# Altium PCB indicator.PcbDoc
Units mil, origin at the board's own origin, x right, y up, seen from the top; angles counter-clockwise.
Board outline 6000 x 4000 mil, 2 copper layers (Top Layer, Bottom Layer); 25 components, 42 nets, 102 pads, 0 vias.
Unrouted connection lines stored in the file: 45.
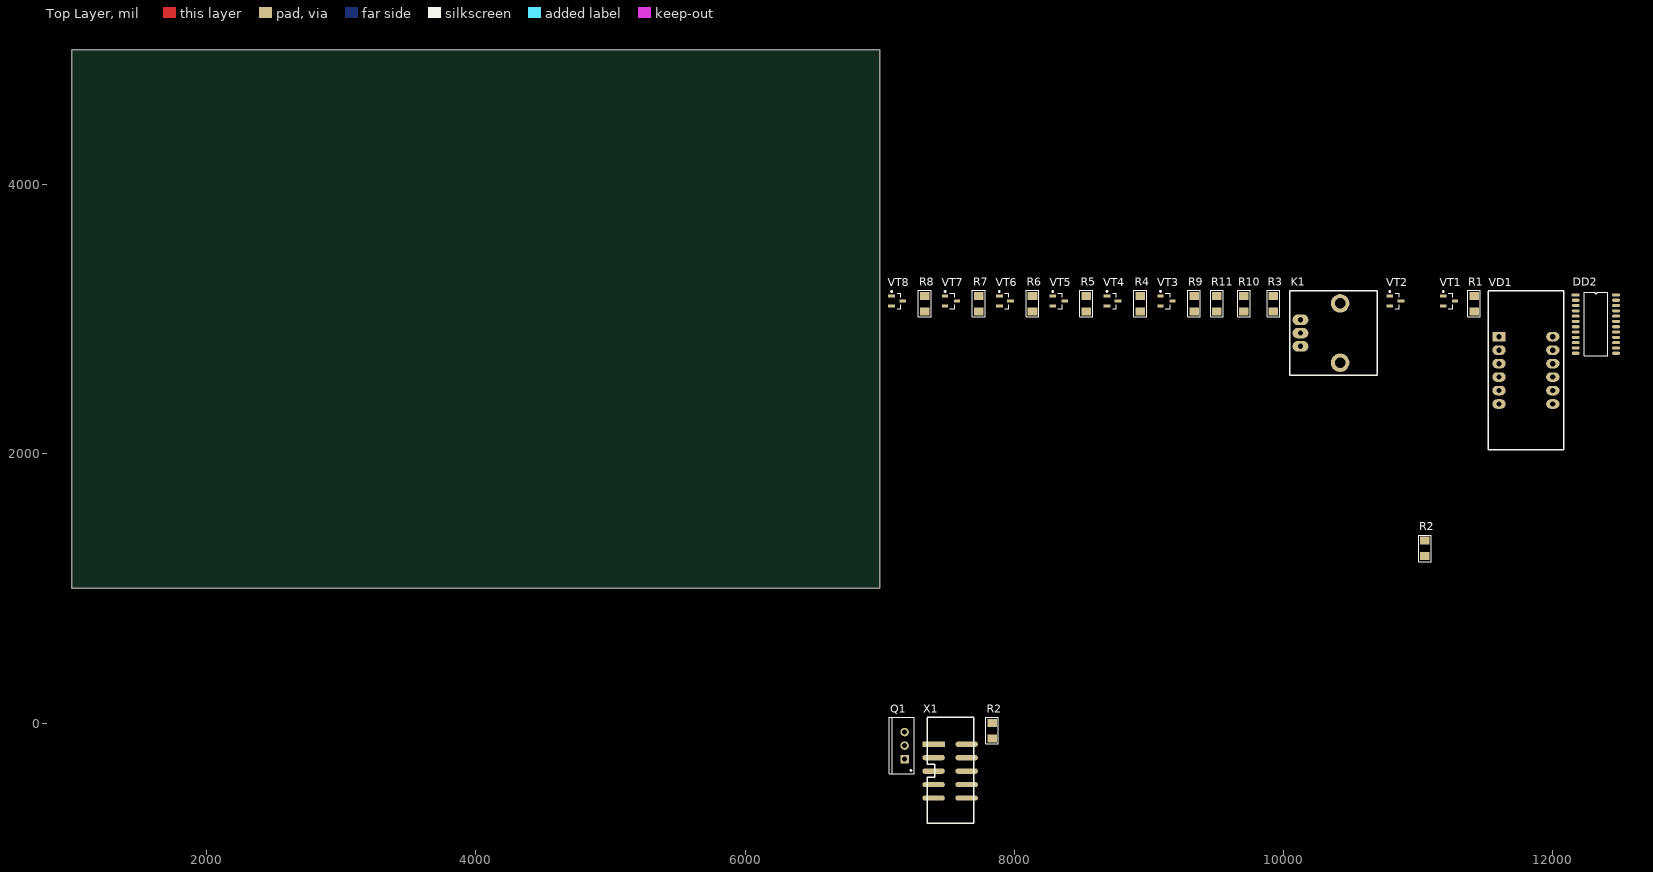
[diagram p0: Top Layer view]
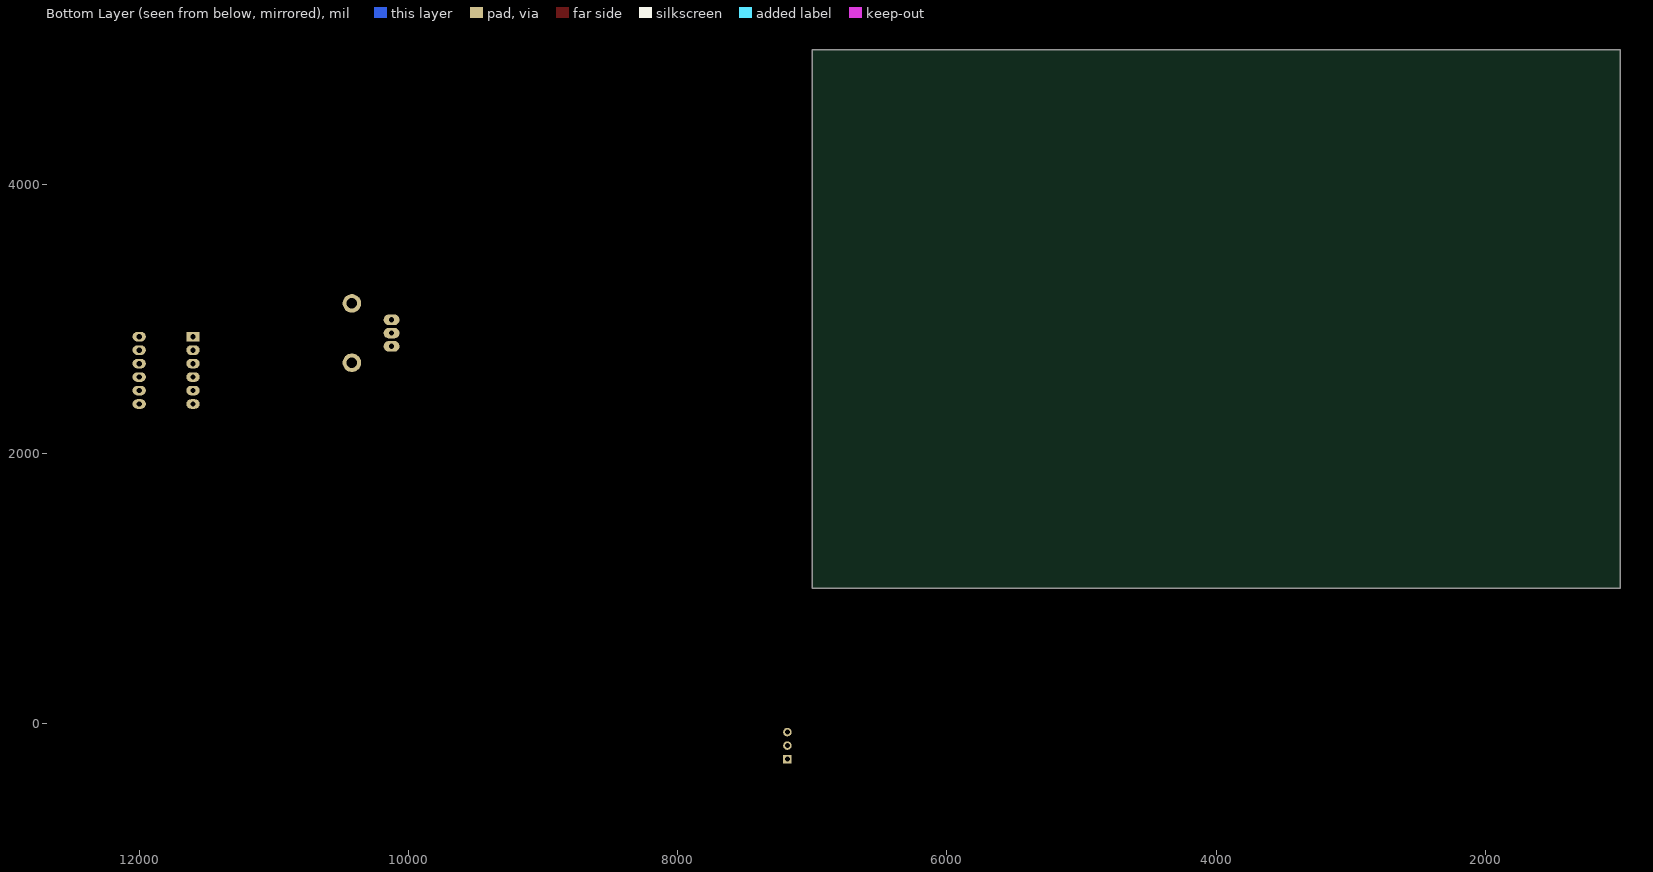
[diagram p1: Bottom Layer view, seen from below]

## Layer stack, top to bottom
Top Solder: solder mask 0.4, Solder Resist, Dk 3.5
Top Layer: signal copper 1.4
Dielectric 1: dielectric 12.6, FR-4, Dk 4.8
Bottom Layer: signal copper 1.4
Bottom Solder: solder mask 0.4, Solder Resist, Dk 3.5

## Board outline
1000,1000 7000,1000 7000,5000 1000,5000

## Design rules (kind name [scope] priority, off if disabled: settings)
Clearance [All] p1: gap=10
PolygonConnect [All] p1: connectstyle=Relief reliefconductorwidth=10 reliefentries=4 polygonreliefangle="90 Angle" airgapwidth=10
RoomDefinition indicator [InComponentClass('indicator')] p1: confinementstyle=ConfineIn formatcopy=TRUE lockcomponents=FALSE outline 7045,1650 12510,1650 12510,3325 7045,3325
RoomDefinition cpu [InComponentClass('cpu')] p2: confinementstyle=ConfineIn formatcopy=TRUE lockcomponents=FALSE outline 7060,-757.09 11125,-757.09 11125,1507.91 7060,1507.91
RoutingVias [All] p1: holewidth=28 width=50 viastyle="Through Hole" minholewidth=28 minwidth=50 maxholewidth=28 maxwidth=50
SolderMaskExpansion [All] p1: expansion=4
Width [All] p1: maxlimit=10 minlimit=10 preferedwidth=10
29 further rules are at their usual default settings.

## Classes and differential pairs
component class indicator: DD2 K1 R1 R2 R3 R4 R5 R6 R7 R8 R9 R10 R11 VD1 VT1 VT2 VT3 VT4 VT5 VT6 VT7 VT8
component class cpu: DA1 DD1 Q1 R2 X1

## Components (designator, comment, footprint, x,y, rotation, side; value= is the part's Value field where it differs from the comment)
DD2 "MBI5026CF" SOP24 12170,3180 r0 top
K1 "EC12" EC12E1220406 10125,2995 r0 top
Q1 "IRFZ46N" TO-220AB 7185,-167.09 r90 top
R1 "1K" R1206 11415,3115 r90 top
R2 "1K" R1206 7835,-57.09 r90 top
R2 "1K" R1206 11050,1297.91 r90 top
R3 "1K" R1206 9925,3115 r90 top
R4 "1K" R1206 8935,3115 r90 top
R5 "1K" R1206 8535,3115 r90 top
R6 "1K" R1206 8135,3115 r90 top
R7 "1K" R1206 7735,3115 r90 top
R8 "1K" R1206 7335,3115 r90 top
R9 "4.7K" R1206 9335,3115 r90 top
R10 "1K" R1206 9705,3115 r90 top
R11 "1K" R1206 9505,3115 r90 top
VD1 "3461BS" 3461bs 11600,2870 r0 top
VT1 "IRLML6302" SOT-23_N 11230,3135 r0 top
VT2 "BC847" SOT23_N 10830,3135 r0 top
VT3 "IRLML6302" SOT-23_N 9130,3135 r0 top
VT4 "BC847" SOT23_N 8730,3135 r0 top
VT5 "IRLML6302" SOT-23_N 8330,3135 r0 top
VT6 "BC847" SOT23_N 7930,3135 r0 top
VT7 "IRLML6302" SOT-23_N 7530,3135 r0 top
VT8 "BC847" SOT23_N 7130,3135 r0 top
X1 "BHS-10" BHS-10 7400,-157.09 r0 top

## Footprints (in the part's own frame and the unit in brackets; to place one, negate y for a bottom-side part, rotate by r counter-clockwise, add the part's x,y. Pads: shape width x height; smd on the part's side, far side on the other; paste and mask are expansions set on the pad)
3461bs [mm]
  rect 2.5x1.8 hole 1: 1(0,0)
  oval 2.5x1.8 hole 1: 2(0,-2.54) 3(0,-5.08) 4(0,-7.62) 5(0,-10.16) 6(0,-12.7) 7(10.16,-12.7) 8(10.16,-10.16) 9(10.16,-7.62) 10(10.16,-5.08) 11(10.16,-2.54) 12(10.16,0)
  silkscreen extent -2.05,-21.35 12.2,8.65, body extent -1.9,-21.45 12.1,8.55, height 7.2
BHS-10 [mm]
  rect 4.25x1 smd: 1(0,0)
  oval 4.25x1 smd: 2(6.25,0) 3(0,-2.54) 4(6.25,-2.54) 5(0,-5.08) 6(6.25,-5.08) 7(0,-7.62) 8(6.25,-7.62) 9(0,-10.16) 10(6.25,-10.16)
  silkscreen extent -1.2,-14.95 7.55,5.05, body extent -1.2,-14.95 7.55,5.05, height 8.6
EC12E1220406 [mm]
  oval 3x2 hole 1: 1(0,0) 2(0,-2.5) 3(0,-5)
  round 3.5 hole 2: 2(7.5,-8.1) 5(7.5,3.1)
  silkscreen extent -2,-10.5 14.5,5.5, body extent -0.15,-9.5 14.1,4.5, height 20.2
R1206 [mm]
  rect 1.5x1.8 smd: 1(-1.45,0) 2(1.45,0)
  silkscreen extent -2.5,-1.2 2.5,1.2, body extent -1.6,-0.85 1.6,0.85, height 0.6
SOP24 [mm]
  rect 1.5x0.6 smd: 1(0,0)
  oval 1.5x0.6 smd: 2(0,-1) 3(0,-2) 4(0,-3) 5(0,-4) 6(0,-5) 7(0,-6) 8(0,-7) 9(0,-8) 10(0,-9) 11(0,-10) 12(0,-11) 13(7.62,-11) 14(7.62,-10) 15(7.62,-9) 16(7.62,-8) 17(7.62,-7) 18(7.62,-6) 19(7.62,-5) 20(7.62,-4) 21(7.62,-3) 22(7.62,-2) 23(7.62,-1) 24(7.62,0)
  silkscreen extent 1.58,-11.5 6.04,0.5, body extent 0.75,-12 6.85,1, height 1.9
SOT23_N [mm] "SOT23, 3-Leads, Body 2.9x1.3mm, Pitch 0.95mm, Lead Span 2.3mm, IPC Medium Density"
  rect 1.3x0.6 smd: 1(-1.05,0.95) 2(-1.05,-0.95) 3(1.05,0)
  silkscreen extent -1.17,-1.5 0.7,1.92, body extent -0.7,-1.5 0.7,1.5, height 1.1
SOT-23_N [mm] "SOT23, 3-Leads, Body 2.9x1.3mm, Pitch 0.95mm, Lead Span 2.3mm, IPC Medium Density"
  rect 1.15x0.6 smd: 1(-1.125,0.95) 2(-1.125,-0.95) 3(1.125,0)
  silkscreen extent -1.25,-1.5 0.7,1.92, body extent -0.7,-1.5 0.7,1.5, height 1.11
TO-220AB [mm] "TO, Thru-Hole, Vertical, Heatsink Mounted; 3 In-Line Leads; Pitch 2.54 mm"
  rect 1.6x1.6 hole 1: 1(-2.54,0)
  round 1.6 hole 1: 2(0,0) 3(2.54,0)
  silkscreen extent -5.35,-1.85 5.35,2.85, body extent -5.4,-1.9 5.4,2.9, height 19.3

## Part data
K1: library part EC12E1220406
Q1 VT1 VT3 VT5 VT7: "HEXFET Power MOSFET"
R1 R2 R2 R3 R4 R5 R6 R7 R8 R9 R10 R11: library part Res
VT2 VT4 VT6 VT8: "NPN General-purpose Transistor"

## Nets (pads, with @x,y where several pads share a name; then routed paths per layer and width w, separated by ;. In a path a pad name is that pad's centre, name@x,y a point inside that pad or via, vN(x,y) a via of type N, cw(c..) or ccw(c..) an arc to the next point about the centre after c; other vN are vias at no path point)
5V: DD2.24 R10.1 R11.1
12V: R1.2 R3.2 R5.2 R7.2 VT1.2 VT3.2 VT5.2 VT7.2
/OE: 
A: DD2.5 VD1.11
A1: VD1.12 VT1.3
A2: VD1.9 VT3.3
A3: VD1.8 VT5.3
A4: VD1.6 VT7.3
B: DD2.6 VD1.7
C: DD2.7 VD1.4
D: DD2.8 VD1.2
E: DD2.9 VD1.1
ENC_A: K1.1 R11.2
ENC_B: K1.3 R10.2
F: DD2.10 VD1.10
G: DD2.11 VD1.5
GND: DD2.1 K1.2 R9.1 VT2.2 VT4.2 VT6.2 VT8.2 X1.2 X1.10
H: DD2.12 VD1.3
LE: DD2.4
MISO: X1.3
MOSI: X1.9
NetDD2_23: DD2.23 R9.2
NetR1_1: R1.1 VT1.1 VT2.3
NetR2_1: VT2.1
NetR3_1: R3.1 VT3.1 VT4.3
NetR4_1: R4.1 VT4.1
NetR5_1: R5.1 VT5.1 VT6.3
NetR6_1: R6.1 VT6.1
NetR7_1: R7.1 VT7.1 VT8.3
NetR8_1: R8.1 VT8.1
OE: DD2.21
PWM: 
R1: R2.2@7835,0
R2: R4.2
R3: R6.2
R4: R8.2
RESET: R2.1@7835,-114.17 X1.5
SCK: X1.1
SDI: DD2.2
SLK: DD2.3
TXD: 
VDD: X1.4
pads on no net: DD2.13 DD2.14 DD2.15 DD2.16 DD2.17 DD2.18 DD2.19 DD2.20 DD2.22 K1.5 Q1.1 Q1.2 Q1.3 R2.1@11050,1240.83 R2.2@11050,1355 X1.6 X1.7 X1.8